# Altium PCB USBtoRS485.PcbDoc
Units mil, origin at the board's own origin, x right, y up, seen from the top; angles counter-clockwise.
Board outline 748.03 x 393.7 mil, 2 copper layers (Top Layer, Bottom Layer); 9 components, 10 nets, 36 pads, 7 vias.
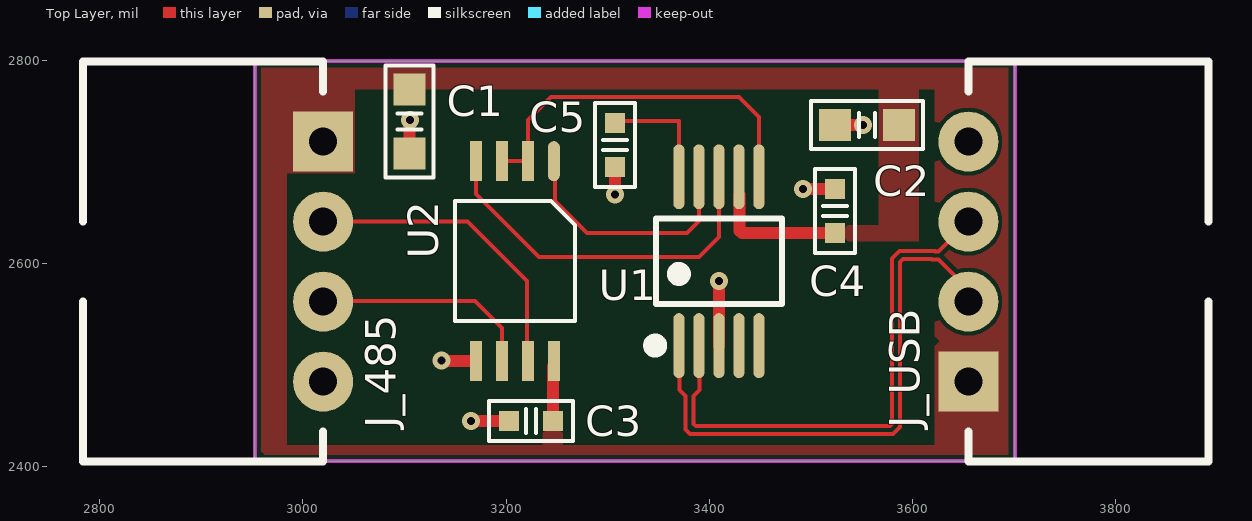
[diagram p0: Top Layer view]
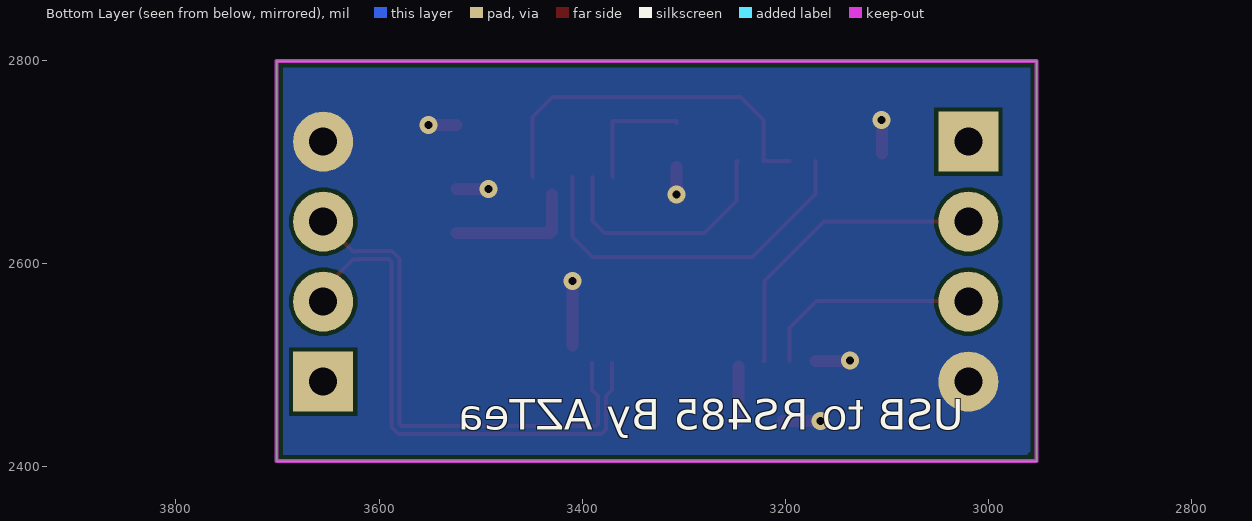
[diagram p1: Bottom Layer view, seen from below]
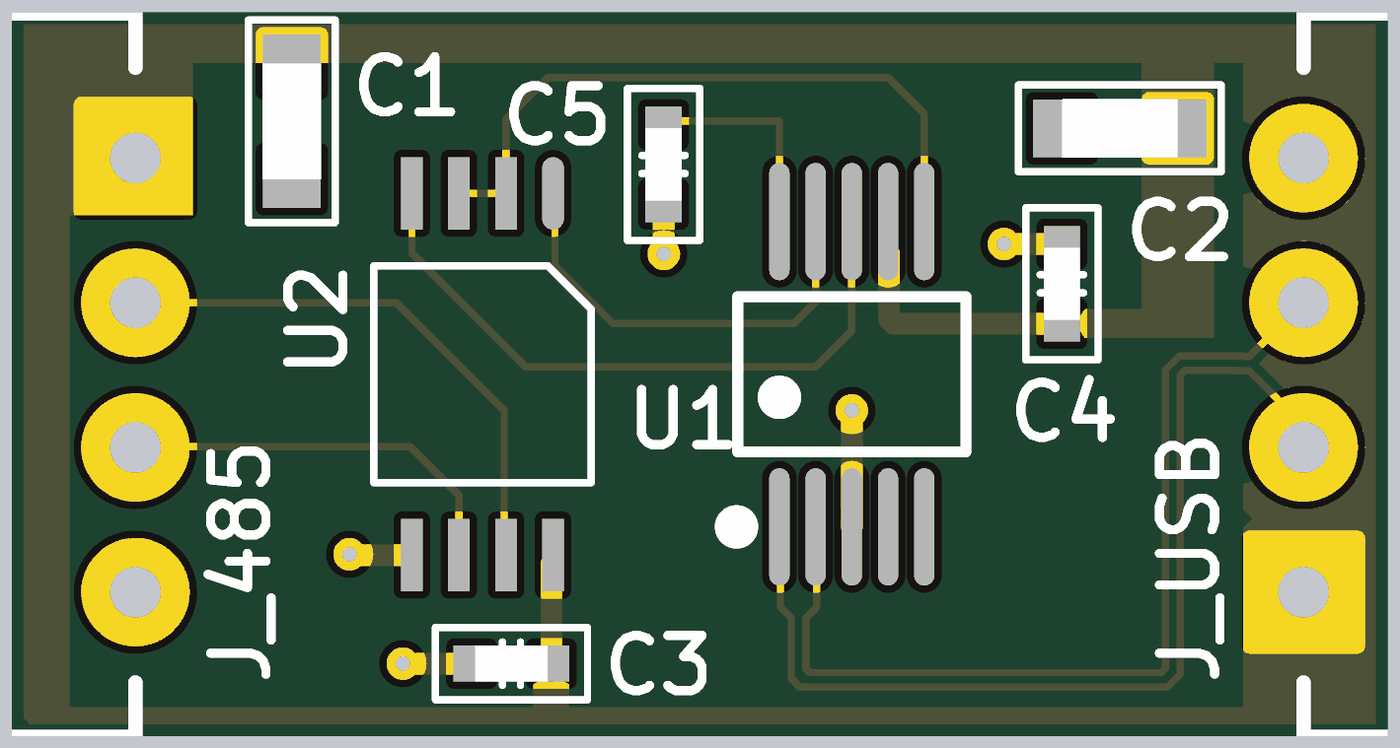
[diagram p2: 3D render of the assembled board from above, using the file's embedded part models]

## Layer stack, top to bottom
Top Solder: solder mask 0.4, Solder Resist, Dk 3.5
Top Layer: signal copper 1.4
Dielectric 1: dielectric 12.6, FR-4, Dk 4.8
Bottom Layer: signal copper 1.4
Bottom Solder: solder mask 0.4, Solder Resist, Dk 3.5

## Board outline
2952.76,2405.51 2952.76,2799.21 3700.79,2799.21 3700.79,2405.51

## Design rules (kind name [scope] priority, off if disabled: settings)
Clearance [All] p1: gap=3.94 ignorepadtopadclearanceinfootprint=FALSE
DiffPairsRouting [All] p1: maxlimit=39.37 minlimit=3.94 mostfreqgap=3.94 toplayer_minwidth=3.94 toplayer_maxwidth=39.37 toplayer_prefwidth=3.94 bottomlayer_minwidth=3.94 bottomlayer_maxwidth=39.37 bottomlayer_prefwidth=3.94 maxuncoupledlength=500
MinimumSolderMaskSliver [All] p1: minsoldermaskwidth=0
PolygonConnect [All] p1: connectstyle=Direct reliefconductorwidth=10 reliefentries=4 polygonreliefangle="90 Angle" airgapwidth=10
RoutingVias [All] p1: holewidth=7.87 width=17.72 viastyle="Through Hole" minholewidth=7.87 minwidth=17.72 maxholewidth=39.37 maxwidth=78.74
SilkToSilkClearance [All] p1: silktosilkclearance=3.94
SilkToSolderMaskClearance [IsPad] p1: minsilkscreentomaskgap=3.94 clearancetoexposedcopper=TRUE
SolderMaskExpansion [All] p1: expansion=4 istentingtop=FALSE
Width [All] p1: maxlimit=78.74 minlimit=3.94 preferedwidth=3.94
26 further rules are at their usual default settings.

## Classes and differential pairs
component class USBtoRS485: C1 C2 C3 C4 C5 U1 U2
differential pair USB: +USB_P -USB_N
differential pair 485: +485_P -485_N

## Components (designator, comment, footprint, x,y, rotation, side; value= is the part's Value field where it differs from the comment)
C1 "10u 10V" C0603 3105,2740 r270 top
C2 "10u 10V" C0603 3555.12,2736.22 r180 top
C3 "0.1u" C0402 3224.41,2444.88 r180 top
C4 "0.1u" C0402 3523.62,2651.57 r90 top
C5 "0.1u" C0402 3307.09,2716.54 r270 top
J_485 "CON4" PH4 3020,2720 r0 top
J_USB "CON4" PH4 3655,2483.78 r180 top
U1 "CH340E" MSOP10 3409.45,2602.36 r0 top
U2 "SIT65HVD08DGK" MSOP8 3208.66,2602.36 r180 top

## Footprints (in the part's own frame and the unit in brackets; to place one, negate y for a bottom-side part, rotate by r counter-clockwise, add the part's x,y. Pads: shape width x height; smd on the part's side, far side on the other; paste and mask are expansions set on the pad)
C0402 [mm]
  rect 0.5x0.5 smd: 1(-0.55,0) 2(0.55,0)
  silkscreen extent -1.05,-0.5 1.05,0.5, body extent -0.5,-0.25 0.5,0.25, height 0.56
C0603 [mm]
  rect 0.8x0.8 smd: 1(-0.8,0) 2(0.8,0)
  silkscreen extent -1.4,-0.6 1.4,0.6, body extent -0.8,-0.41 0.8,0.41, height 0.9
MSOP8 [mm]
  oval 0.3x1 smd: 1(-0.975,-2.5)
  rect 0.3x1 smd: 2(-0.325,-2.5) 3(0.325,-2.5) 4(0.975,-2.5) 5(0.975,2.5) 6(0.325,2.5) 7(-0.325,2.5) 8(-0.975,2.5)
  silkscreen extent -1.5,-1.5 1.5,1.5, body extent -1.5,-2.4 1.5,2.5, height 1.1
MSOP10 [mm]
  oval 0.28x1.62 smd: 1(-1,-2.11) 2(-0.5,-2.11) 3(0,-2.11) 4(0.5,-2.11) 5(1,-2.11) 6(1,2.11) 7(0.5,2.11) 8(0,2.11) 9(-0.5,2.11) 10(-1,2.11)
  silkscreen extent -1.74,-2.26 1.58,1.07, body extent -1.75,-2.25 1.75,2, height 1.1
PH4 [mm]
  rect 1.5x1.5 hole 0.7: 1(0,0)
  round 1.5 hole 0.7: 2(0,-2) 3(0,-4) 4(0,-6)
  silkscreen extent -6,-8 0,2

## Part data
C1 C2: library part "cap 0603", "C0603"
C3 C4 C5: library part "cap 0402", "C0402"
J_485 J_USB: library part CON_4
U2: "10Mbps RS422, RS485 Transceiver MSOP-8 RS-485/RS-422 ICs ROHS"

## Via types
v1: diameter 17.72, hole 7.87, Top Layer to Bottom Layer, 7 vias

## Nets (pads, with @x,y where several pads share a name; then routed paths per layer and width w, separated by ;. In a path a pad name is that pad's centre, name@x,y a point inside that pad or via, vN(x,y) a via of type N, cw(c..) or ccw(c..) an arc to the next point about the centre after c; other vN are vias at no path point)
485_N: J_485.2 U2.7 | length 304.5
  Top Layer w3.94: J_485.2 3161.89,2641.26 3220.47,2582.68 3220.47,2503.94 U2.7
485_P: J_485.3 U2.6 | length 219.8
  Top Layer w3.94: J_485.3 3020,2562.99 3169.29,2562.99 3195.87,2536.42 U2.6
GND: C1.2 C2.2 C3.2 C4.2 C5.2 J_485.4 J_USB.4 U1.3 U2.5 | length 254.4
  Top Layer w11.81: C1.2 3105,2741.26 v1(3105.33,2741.26) ; v1(3136.4,2504.38) 3136.4,2503.94 U2.5 ; v1(3165.35,2444.88) C3.2 ; C5.2 3307.09,2667.82 v1(3307.21,2667.82) ; U1.3 v1(3409.45,2582.68) ; v1(3492.13,2673.23) C4.2 ; C2.2 v1(3551.18,2736.22)
NetC5_1: C5.1 U1.10 | length 119.7
  Top Layer w3.94: C5.1 3307.09,2740.16 3370.08,2740.16 U1.10
RXD: U1.9 U2.1 | length 243.7
  Top Layer w3.94: U2.1 3248.03,2700.79 3248.03,2661.42 3279.53,2629.92 3377.95,2629.92 3389.76,2641.73 U1.9
RXW_485: U1.6 U2.2 U2.3 | length 369.5
  Top Layer w3.94: U2.3 U2.2 3221.46,2741.14 3244.09,2763.78 3429.13,2763.78 3448.82,2744.09 U1.6
TXD: U1.8 U2.4 | length 364.9
  Top Layer w3.94: U2.4 3170.28,2668.31 3232.28,2606.3 3389.76,2606.3 3409.45,2625.98 U1.8
USB_N: J_USB.3 U1.2 | length 518.5
  Top Layer w3.94: U1.2@3390.32,2501.93 3390.32,2475.61 3384.41,2469.7 3384.41,2442.31 3386.72,2440 3577.69,2440 3580,2442.31 3580,2605 3587.31,2612.31 3621.98,2612.31 3622.24,2612.05 3625.5,2612.05 3655,2641.55 J_USB.3@3655,2647.48
USB_P: J_USB.2 U1.1 | length 532.9
  Top Layer w3.94: U1.1@3370.63,2501.93 3370.63,2475.61 3376.54,2469.7 3376.54,2436.74 3381.15,2432.13 3580.96,2432.13 3587.87,2439.04 3587.87,2601.74 3590.57,2604.43 3618.72,2604.43 3618.98,2604.17 3625.5,2604.17 3655,2574.67 J_USB.2@3655,2568.74
VCC5V: C1.1 C2.1 C3.1 C4.1 J_485.1 J_USB.1 U1.7 U2.8 | length 188.5
  Top Layer w3.94: U2.8@3243.39,2501.57 U2.8@3246.06,2498.9 ; 3429.68,2632.23 3431.99,2629.92
  Top Layer w11.81: C3.1 U2.8@3246.06,2498.9 ; 3429.68,2632.23 U1.7@3429.68,2668.07 ; 3431.99,2629.92 C4.1
pads on no net: U1.4 U1.5

## Polygon pours and split planes (outlines as drawn)
VCC5V on Top Layer "VCC5V" (solid, pour order 1): 3700.79,2523.62 3700.79,2405.51 2952.76,2405.51 2952.76,2799.21 3700.79,2799.21 3700.79,2523.62 3622.05,2523.62 3622.05,2771.65 3606.3,2771.65 3606.3,2716.54 3606.3,2622.05 3586.61,2622.05 3515.75,2622.05 3515.75,2637.8 3566.93,2637.8 3566.93,2716.54 3566.93,2771.65 3051.18,2771.65 3051.18,2688.98 2984.25,2688.98 2984.25,2421.26 3236.22,2421.26 3236.22,2437.01 3236.22,2452.76 3255.91,2452.76 3255.91,2440.94 3255.91,2421.26 3622.05,2421.26 3622.05,2523.62
GND on Bottom Layer "GND" (solid, pour order 9): 2952.76,2799.21 3700.79,2799.21 3700.79,2405.51 2952.76,2405.51

## Keep-outs
Keep-Out Layer:
  the board outline again, w3.94

## Silkscreen, mask and mechanical layers (free items; w line width, h text height)
Bottom Overlay:
  text "USB to RS485 By AZTea" at 3024.68,2436.26 h30